# EAGLE board ADCModule (EAGLE 6.4)
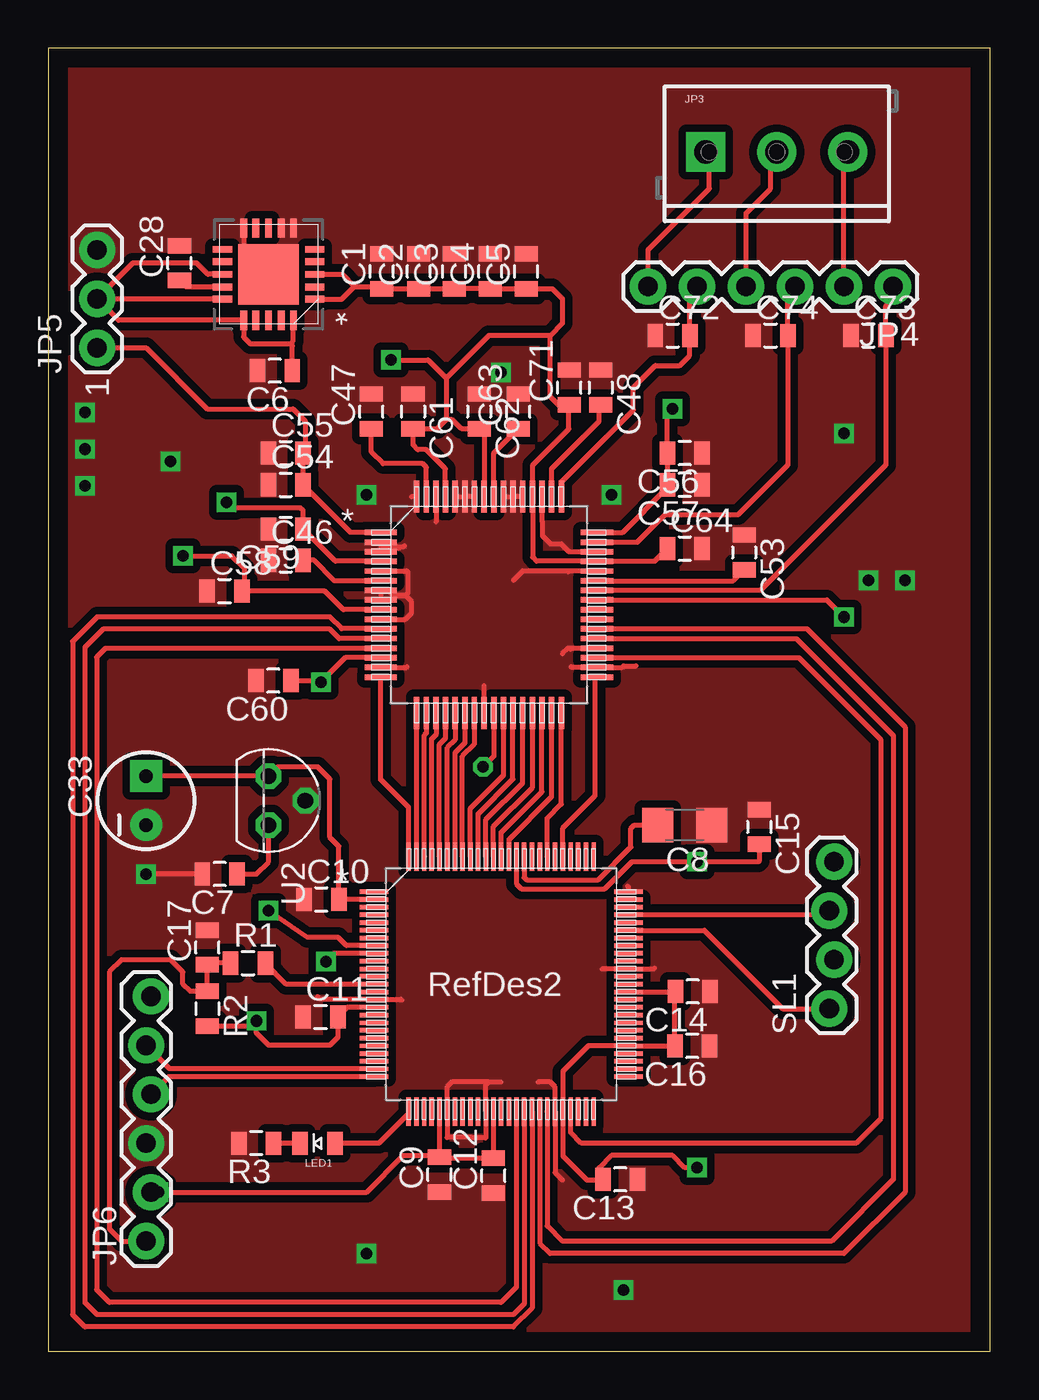
[diagram p0: board, top side]
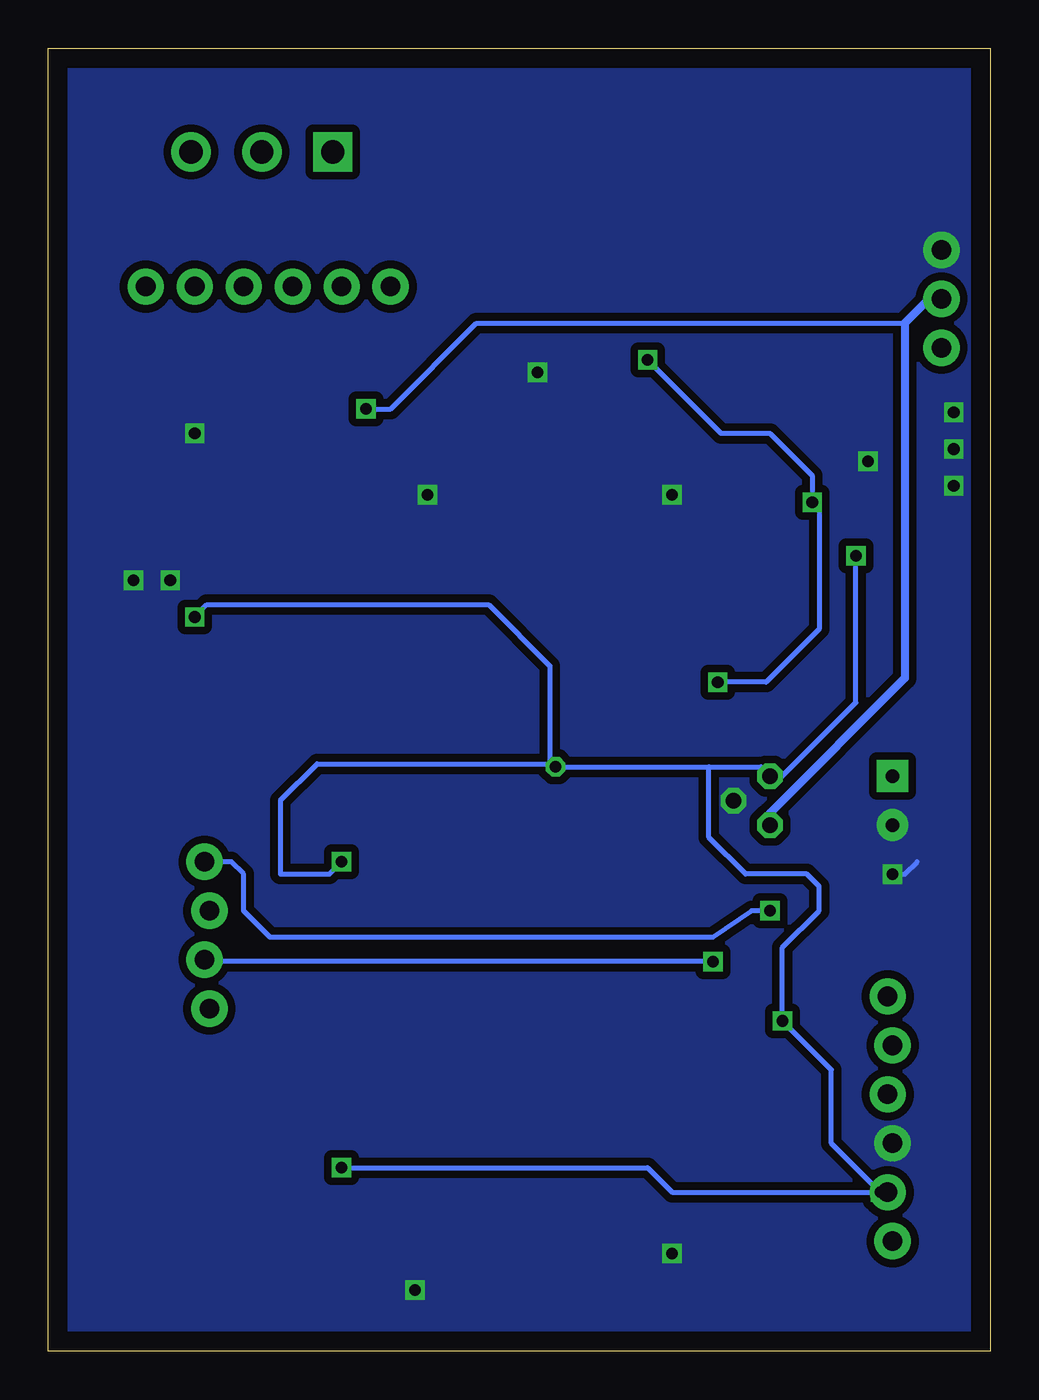
[diagram p1: board, bottom side, seen from below]

Size 48.88 x 67.61 mm. Coordinates in mm from the lower left corner, seen from the top.
Outline: 0,0 48.88,0 48.88,67.61 0,67.61 0,0
Copper layers (1*16): Top 0.035mm / dielectric 1.5mm / Bottom 0.035mm
Design rules "default": minimum track width 10mil, minimum drill 24mil, track to track 8mil, track to pad 8mil, pad to pad 8mil, via to via 8mil, smd to smd 8mil, copper to edge 40mil, drill to drill 8mil, minimum pad ring 10mil, minimum via ring 8mil, stop-mask expansion 4mil, vias tented up to drill 0mil, thermal gap 10mil

## Footprints (pad centres in the part's own frame; a part is rotated, then mirrored left to right if it is on the bottom)
0805 = smd 0.8 x 1.2: 1 -0.9,0; 2 0.9,0
1206 = smd 1.6 x 1.8: 1 -1.4,0; 2 1.4,0
CPOL-RADIAL-10UF-25V = drill 0.7 pad 1.651 square: 1 1.27,0 | drill 0.7 pad 1.651: 2 -1.27,0
SCREWTERMINAL-3.5MM-3_LOCK.007S = drill 1.2 pad 2.032 square: 1 -0.178,0 | drill 1.2 pad 2.032: 2 3.5,0; 3 7.178,0
1X06 = drill 1.016 pad 1.88: 1 -6.35,0; 2 -3.81,0; 3 -1.27,0; 4 1.27,0; 5 3.81,0; 6 6.35,0
1X03 = drill 1.016 pad 1.88: 1 -2.54,0; 2 0,0; 3 2.54,0
1X06-SIP_LOCK = drill 1.016 pad 1.88: 1 0,0; 2 2.54,-0.254; 3 5.08,0; 4 7.62,-0.254; 5 10.16,0; 6 12.7,-0.254
LED-0805 = smd 0.8 x 1.2: 1 -0.9,0; 2 0.9,0
1X04_LOCK = drill 1.016 pad 1.88: 1 0,0.127; 2 2.54,-0.127; 3 5.08,0.127; 4 7.62,-0.127
PM64 = smd 1.676 x 0.279: 1 -5.613,3.759; 2 -5.613,3.251; 3 -5.613,2.743; 4 -5.613,2.261; 5 -5.613,1.753; 6 -5.613,1.245; 7 -5.613,0.762; 8 -5.613,0.254; 9 -5.613,-0.254; 10 -5.613,-0.762; 11 -5.613,-1.245; 12 -5.613,-1.753; 13 -5.613,-2.261; 14 -5.613,-2.743; 15 -5.613,-3.251; 16 -5.613,-3.759; 33 5.613,-3.759; 34 5.613,-3.251; 35 5.613,-2.743; 36 5.613,-2.261; 37 5.613,-1.753; 38 5.613,-1.245; 39 5.613,-0.762; 40 5.613,-0.254; 41 5.613,0.254; 42 5.613,0.762; 43 5.613,1.245; 44 5.613,1.753; 45 5.613,2.261; 46 5.613,2.743; 47 5.613,3.251; 48 5.613,3.759 | smd 0.279 x 1.676: 17 -3.759,-5.613; 18 -3.251,-5.613; 19 -2.743,-5.613; 20 -2.261,-5.613; 21 -1.753,-5.613; 22 -1.245,-5.613; 23 -0.762,-5.613; 24 -0.254,-5.613; 25 0.254,-5.613; 26 0.762,-5.613; 27 1.245,-5.613; 28 1.753,-5.613; 29 2.261,-5.613; 30 2.743,-5.613; 31 3.251,-5.613; 32 3.759,-5.613; 49 3.759,5.613; 50 3.251,5.613; 51 2.743,5.613; 52 2.261,5.613; 53 1.753,5.613; 54 1.245,5.613; 55 0.762,5.613; 56 0.254,5.613; 57 -0.254,5.613; 58 -0.762,5.613; 59 -1.245,5.613; 60 -1.753,5.613; 61 -2.261,5.613; 62 -2.743,5.613; 63 -3.251,5.613; 64 -3.759,5.613
TO92 = drill 0.813 octagon: 1 -1.27,0; 2 0,1.905; 3 1.27,0
TQFP100_12X12MC = smd 1.473 x 0.229: 1 -6.604,4.801; 2 -6.604,4.394; 3 -6.604,3.988; 4 -6.604,3.607; 5 -6.604,3.2; 6 -6.604,2.794; 7 -6.604,2.388; 8 -6.604,2.007; 9 -6.604,1.6; 10 -6.604,1.194; 11 -6.604,0.787; 12 -6.604,0.406; 13 -6.604,0; 14 -6.604,-0.406; 15 -6.604,-0.787; 16 -6.604,-1.194; 17 -6.604,-1.6; 18 -6.604,-2.007; 19 -6.604,-2.388; 20 -6.604,-2.794; 21 -6.604,-3.2; 22 -6.604,-3.607; 23 -6.604,-3.988; 24 -6.604,-4.394; 25 -6.604,-4.801; 51 6.604,-4.801; 52 6.604,-4.394; 53 6.604,-3.988; 54 6.604,-3.607; 55 6.604,-3.2; 56 6.604,-2.794; 57 6.604,-2.388; 58 6.604,-2.007; 59 6.604,-1.6; 60 6.604,-1.194; 61 6.604,-0.787; 62 6.604,-0.406; 63 6.604,0; 64 6.604,0.406; 65 6.604,0.787; 66 6.604,1.194; 67 6.604,1.6; 68 6.604,2.007; 69 6.604,2.388; 70 6.604,2.794; 71 6.604,3.2; 72 6.604,3.607; 73 6.604,3.988; 74 6.604,4.394; 75 6.604,4.801 | smd 0.229 x 1.473: 26 -4.801,-6.604; 27 -4.394,-6.604; 28 -3.988,-6.604; 29 -3.607,-6.604; 30 -3.2,-6.604; 31 -2.794,-6.604; 32 -2.388,-6.604; 33 -2.007,-6.604; 34 -1.6,-6.604; 35 -1.194,-6.604; 36 -0.787,-6.604; 37 -0.406,-6.604; 38 0,-6.604; 39 0.406,-6.604; 40 0.787,-6.604; 41 1.194,-6.604; 42 1.6,-6.604; 43 2.007,-6.604; 44 2.388,-6.604; 45 2.794,-6.604; 46 3.2,-6.604; 47 3.607,-6.604; 48 3.988,-6.604; 49 4.394,-6.604; 50 4.801,-6.604; 76 4.801,6.604; 77 4.394,6.604; 78 3.988,6.604; 79 3.607,6.604; 80 3.2,6.604; 81 2.794,6.604; 82 2.388,6.604; 83 2.007,6.604; 84 1.6,6.604; 85 1.194,6.604; 86 0.787,6.604; 87 0.406,6.604; 88 0,6.604; 89 -0.406,6.604; 90 -0.787,6.604; 91 -1.194,6.604; 92 -1.6,6.604; 93 -2.007,6.604; 94 -2.388,6.604; 95 -2.794,6.604; 96 -3.2,6.604; 97 -3.607,6.604; 98 -3.988,6.604; 99 -4.394,6.604; 100 -4.801,6.604
RGW20_3P15X3P15 = smd 0.991 x 0.356: 1 -2.388,1.295; 2 -2.388,0.66; 3 -2.388,0; 4 -2.388,-0.66; 5 -2.388,-1.295; 11 2.388,-1.295; 12 2.388,-0.66; 13 2.388,0; 14 2.388,0.66; 15 2.388,1.295 | smd 0.356 x 0.991: 6 -1.295,-2.388; 7 -0.66,-2.388; 8 0,-2.388; 9 0.66,-2.388; 10 1.295,-2.388; 16 1.295,2.388; 17 0.66,2.388; 18 0,2.388; 19 -0.66,2.388; 20 -1.295,2.388 | smd 3.15 x 3.15: 21 0,0

## Placement (x,y rotation side)
C1  10uF  [0805]  17.3,56.03 90 top
C2  10uF  [0805]  19.23,56.03 90 top
C3  10uF  [0805]  21.06,56.03 90 top
C4  10uF  [0805]  22.94,56.03 90 top
C5  10uF  [0805]  24.79,56.03 90 top
C6  10uF  [0805]  11.76,50.88 180 top
C7  10uF  [0805]  8.89,24.77 180 top
C8  10uF  [1206]  33.02,27.3 180 top
C9  .1uF  [0805]  20.29,9.17 90 top
C10  .1uF  [0805]  14.17,23.44 0 top
C11  .1uF  [0805]  14.12,17.35 0 top
C12  .1uF  [0805]  23.09,9.12 90 top
C13  .1uF  [0805]  29.67,8.92 180 top
C14  .1uF  [0805]  33.43,18.67 180 top
C15  .1uF  [0805]  36.88,27.2 270 top
C16  .1uF  [0805]  33.4,15.85 180 top
C17  .1uF  [0805]  8.26,20.95 90 top
C28  1uF  [0805]  6.81,56.46 90 top
C33  10uF  [CPOL-RADIAL-10UF-25V]  5.08,28.57 90 top
C46  10uF  [0805]  12.32,41.05 0 top
C47  10uF  [0805]  16.76,48.77 90 top
C48  10uF  [0805]  28.65,50.01 270 top
C53  10uF  [0805]  36.09,41.45 270 top
C54  10uF  [0805]  12.32,44.96 0 top
C55  .1uF  [0805]  12.32,46.61 0 top
C56  10uF  [0805]  33.02,46.61 180 top
C57  .1uF  [0805]  33.02,44.96 180 top
C58  1uF  [0805]  9.14,39.45 0 top
C59  .1uF  [0805]  12.32,42.67 180 top
C60  .1uF  [0805]  11.68,34.8 180 top
C61  .1uF  [0805]  18.92,48.77 270 top
C62  .1uF  [0805]  22.35,48.77 270 top
C63  .47uF  [0805]  24.38,48.77 90 top
C64  .1uF  [0805]  33.02,41.66 0 top
C71  .1uF  [0805]  27.03,50.01 90 top
C72  10nF  [0805]  32.38,52.71 0 top
C73  10nF  [0805]  42.55,52.71 0 top
C74  10nF  [0805]  37.47,52.71 0 top
JP3  M03SCREW_LOCK  [SCREWTERMINAL-3.5MM-3_LOCK.007S]  34.29,62.23 0 top
JP4  [1X06]  37.47,55.25 180 top
JP5  M03PTH  [1X03]  2.54,54.61 90 top
JP6  [1X06-SIP_LOCK]  5.08,5.71 90 top
LED1  [LED-0805]  13.97,10.79 180 top
R1  470  [0805]  10.36,20.14 0 top
R2  10k  [0805]  8.26,17.78 270 top
R3  [0805]  10.79,10.79 180 top
SL1  [1X04_LOCK]  40.64,17.78 90 top
U1  ADS8568_PM_64  [PM64]  22.86,38.74 0 top
U2  LP2950-3.3ACZ  [TO92]  11.43,28.57 270 top
U$1  PIC32MX795F512L-  [TQFP100_12X12MC]  23.5,19.05 0 top
U$3  TPS7A4700_RGW_20  [RGW20_3P15X3P15]  11.43,55.88 180 top

## Library data of the parts
C1-C17 C28 C33 C46-C48 C53-C64 C71-C74 R1-R3 U1 U$1 U$3 = SensorCape
JP3-JP6 LED1 SL1 U2 = ASL

## Nets
AA1_R_OUT: C73.2 JP4.1 U1.42
AA2_R_OUT: C74.2 JP4.3 U1.47
AA3_R_OUT: C72.2 JP4.5 U1.49
BUSY: U1.35 U$1.47
CONV_A: U1.37 U$1.44
CONV_B: U1.38 U$1.43
CONV_C: U1.39
CONV_D: U1.40
CS*: U1.13 U$1.40
GND: C1.2 C2.2 C3.2 C4.2 C5.2 C6.2 C7.2 C8.1 C9.1 C10.1 C11.1 C12.1 C13.1 C14.1 C15.1 C16.1 C17.2 C28.2 C33.2 C46.1 C47.2 C48.1 C53.1 C54.1 C55.1 C56.1 C57.1 C58.1 C59.2 C60.2 C61.1 C62.1 C63.2 C64.2 C71.2 C72.1 C73.1 C74.1 JP5.3 JP6.3 R3.2 U1.2 U1.3 U1.5 U1.7 U1.8 U1.10 U1.15 U1.24 U1.34 U1.36 U1.44 U1.46 U1.51 U1.53 U1.54 U1.55 U1.58 U1.59 U1.60 U1.62 U1.64 U2.2 U$1.15 U$1.31 U$1.36 U$1.45 U$1.65 U$1.75 U$3.6 U$3.7 U$3.10 U$3.21
HVDD_12A: C6.1 C7.1 C56.2 C57.2 JP5.2 U1.48 U2.3 U$3.13 U$3.15 U$3.16 U$3.20
HVSS_12A: C54.2 C55.2 JP5.1 U1.1
MCLR: C17.1 JP6.1 R1.1 R2.1
MISO: SL1.2 U$1.9
MOSI: SL1.3 U$1.72
N$1: JP3.3 JP4.2
N$2: JP3.2 JP4.4
N$3: JP3.1 JP4.6
N$4: C8.2 U$1.85
N$7: C63.1 U1.56
N$14: R1.2 U$1.13
N$15: LED1.1 U$1.26
N$16: LED1.2 R3.1
N$45: C28.1 U$3.14
N$87: C46.2 U1.6
N$93: C53.2 U1.43
N$94: C48.2 U1.50
N$96: C47.1 U1.63
PGC: JP6.5 U$1.24
PGD: JP6.4 U$1.25
PMP0: U1.33 U$1.80
PMP1: U1.32 U$1.82
PMP2: U1.31 U$1.87
PMP3: U1.30 U$1.88
PMP4: U1.29 U$1.89
PMP5: U1.28 U$1.90
PMP6: U1.27 U$1.91
PMP7: U1.26 U$1.92
PMP8: U1.23 U$1.93
PMP9: U1.22 U$1.94
PMP10: U1.21 U$1.95
PMP11: U1.20 U$1.96
PMP12: U1.19 U$1.97
PMP13: U1.18 U$1.98
PMP14: U1.17 U$1.99
PMP15: U1.16 U$1.100
RD*: U1.12 U$1.41
SCK: SL1.1 U$1.70
SS: SL1.4 U$1.8
VDD3V3_D: C9.2 C10.2 C11.2 C12.2 C13.2 C14.2 C15.2 C16.2 C33.1 C58.2 JP6.2 R2.2 U1.9 U1.25 U1.41 U2.1 U$1.2 U$1.16 U$1.30 U$1.37 U$1.46 U$1.55 U$1.62 U$1.86
VDD5V0_A: C1.1 C2.1 C3.1 C4.1 C5.1 C59.1 C60.1 C61.2 C62.2 C64.1 C71.1 U1.4 U1.14 U1.45 U1.52 U1.57 U1.61 U$3.1 U$3.3
WR*: U1.11 U$1.42

## Tracks (layer width: path | path; a pad name or v marks a point on that pad's centre or on a via)
AA1_R_OUT
  Top 0.254: JP4.1 43.81,54.61 43.45,54.24 C73.2 43.45,45.99 36.96,39.5 U1.42
AA2_R_OUT
  Top 0.254: U1.47 30.56,41.99 31.75,43.18 31.77,43.18 32,43.41 35.79,43.41 38.37,45.99 C74.2 38.37,54.88 JP4.3
AA3_R_OUT
  Top 0.254: JP4.5 33.28,54.88 C72.2 33.27,52.69 33.27,51.66 32.77,51.16 31.5,51.16 30.35,50.01 30.35,48.84 26.62,45.11 U1.49
BUSY
  Top 0.254: U1.35 38.94,35.99 43.18,31.75 43.18,12.06 41.91,10.79 27.66,10.79 27.1,11.35 U$1.47
CONV_A
  Top 0.254: U1.37 38.81,36.98 43.84,31.95 43.84,8.91 40.64,5.71 26.67,5.71 25.88,6.5 U$1.44
CONV_B
  Top 0.254: U1.38 39.34,37.49 44.45,32.38 44.45,8.26 41.27,5.08 26.04,5.08 25.5,5.61 U$1.43
CS*
  Top 0.254: U1.13 2.97,36.47 2.52,36.02 2.52,3.2 3.17,2.54 23.5,2.54 24.28,3.33 U$1.40
GND  (via drill 0.6)
  Top 0.254: U1.62 20.12,43.03 | U1.64 18.85,44.35 | 18.49,41.78 18.47,41.76 17.35,41.76 17.25,41.86 U1.2 U1.3 17.25,41.5 17.42,41.68 18.21,41.68 18.24,41.71 | U1.5 18.59,40.49 18.67,40.41 18.67,39.37 18.54,39.24 17.86,39.24 17.6,39.5 U1.7 U1.8 17.73,38.99 17.96,39.22 18.54,39.22 18.82,38.94 18.82,38.28 18.52,37.97 U1.10 | U1.15 18.59,35.48 18.62,35.51 | 26.95,40.44 27,40.49 U1.44 24.61,40.49 24.13,40.01 | U1.46 27.03,41.48 26.59,41.91 26.04,41.91 25.63,42.32 25.63,43.03 25.6,43.05 U1.51 | 27.13,35.51 27.15,35.48 U1.34 29.77,35.48 29.84,35.56 30.48,35.56 | U1.36 27.15,36.47 | 27.15,36.47 27.1,36.42 | U1.24 22.61,34.54 | 27.15,36.47 26.95,36.47 26.67,36.2 | U1.55 U1.54 U1.53 | U$3.10 10.13,57.18 U$3.21 | U1.58 U1.59 U1.60 | U$1.75 30.1,24.11 30.07,24.11 30.05,24.13 | 31.45,19.89 31.39,19.84 U$1.65 28.73,19.84 | 22.68,11.07 22.71,11.1 U$1.36 22.71,13.82 22.86,13.97 | 20.7,11.12 U$1.31 20.7,13.74 20.93,13.97 22.86,13.97 | 20.7,11.12 20.68,11.1 | 18.34,18.21 18.29,18.26 U$1.15 14.12,18.26 13.97,18.41 | 26.67,8.89 26.29,9.27 U$1.45 26.29,13.72 26.04,13.97 25.4,13.97 | 20.7,11.12 21.92,11.12 21.95,11.1 22.63,11.1 22.68,11.15 | C7.2 v5.08,24.77 | 22.86,13.97 23.5,13.97
  Bottom 0.254: v5.08,24.77 4.45,24.77 3.81,25.4
  other vias: 42.55,40.01 44.45,40.01 6.35,46.18 1.91,44.91 1.91,46.81 1.91,48.72 41.27,47.62 23.5,50.8 16.51,44.45 29.21,44.45 16.51,5.08 29.84,3.17
  pour Top (isolate 0.406, no thermals): 0,67.31 48.9,67.31 48.9,-0.13 0,-0.13
  pour Bottom (isolate 0.406, no thermals): 0,0 48.9,0 48.9,67.31 0,67.31
HVDD_12A  (via drill 0.6)
  Top 0.254: U$3.15 2.54,54.59 JP5.2 | U$3.13 8.28,55.88 7.7,56.46 4.39,56.46 JP5.2 | JP5.2 3.66,53.49 U$3.16 10.13,52.63 10.49,52.27 12.55,52.27 | 12.55,52.27 12.7,52.43 12.7,53.47 U$3.20 | C6.1 12.66,52.16 12.55,52.27 | U1.48 29.79,42.49 32.12,44.82 C57.2 C56.2 32.12,48.63 v32.38,48.9 | C7.1 10.79,24.77 11.43,25.4 U2.3
  Bottom 0.254: v32.38,48.9 31.11,48.9 26.67,53.34 4.45,53.34
  Bottom 0.406: U2.3 11.43,27.94 4.45,34.93 4.45,53.34 3.17,54.61 JP5.2
HVSS_12A
  Top 0.254: JP5.1 5.08,52.07 8.26,48.9 12.7,48.9 13.34,48.26 13.34,46.73 C55.2 C54.2 15.68,42.49 U1.1
MCLR
  Top 0.254: R1.1 8.34,20.14 C17.1 R2.1 7.36,18.68 6.99,19.05 6.99,19.68 6.35,20.32 3.81,20.32 3.17,19.68 3.17,6.35 3.81,5.71 JP6.1
MISO  (via drill 0.6)
  Top 0.254: U$1.9 14.83,20.65 v14.4,20.22
  Bottom 0.254: v14.4,20.22 40.66,20.22 SL1.2
MOSI
  Top 0.254: U$1.72 40.31,22.66 SL1.3
N$1
  Top 0.254: JP4.2 41.27,62.04 JP3.3
N$2
  Top 0.254: JP4.4 36.2,59.05 37.47,60.33 37.47,61.91 JP3.2
N$3
  Top 0.254: JP4.6 31.11,57.15 34.29,60.33 34.29,62.05 JP3.1
N$4
  Top 0.254: U$1.85 24.69,24.59 24.82,24.46 28.52,24.46 30.23,26.16 30.23,27.13 30.4,27.3 C8.2
N$7
  Top 0.254: U1.56 23.11,46.61 23.5,46.99 23.51,46.99 C63.1
N$14
  Top 0.254: U$1.13 12.36,19.05 R1.2
N$15
  Top 0.254: U$1.26 18.69,12.34 17.14,10.79 LED1.1
N$16
  Top 0.254: LED1.2 R3.1
N$45
  Top 0.254: U$3.14 7.15,55.22 C28.1
N$87
  Top 0.254: U1.6 14.86,39.98 13.79,41.05 C46.2
N$93
  Top 0.254: U1.43 35.52,39.98 C53.2
N$94
  Top 0.254: U1.50 26.11,45.8 28.57,48.26 28.57,49.04 C48.2
N$96
  Top 0.254: U1.63 19.61,45.87 19.43,46.05 17.37,46.05 16.76,46.66 C47.1
PGC
  Top 0.254: U$1.24 6.3,14.66 JP6.5
PGD
  Top 0.254: U$1.25 6.25,14.25 JP6.4
PMP0
  Top 0.254: U$1.80 26.7,27.15 28.37,28.83 28.37,34.87 U1.33
PMP1
  Top 0.254: U$1.82 25.88,27.66 26.62,28.4 U1.32
PMP2
  Top 0.254: U$1.87 23.9,26.57 26.11,28.78 U1.31
PMP3
  Top 0.254: U$1.88 23.5,26.92 25.6,29.03 U1.30
PMP4
  Top 0.254: U$1.89 23.09,27.23 25.12,29.26 U1.29 25.09,33.1
PMP5
  Top 0.254: U$1.90 22.71,27.58 24.61,29.49 U1.28
PMP6
  Top 0.254: U$1.91 22.3,27.89 24.11,29.69 U1.27
PMP7
  Top 0.254: U$1.92 21.89,28.17 23.62,29.9 U1.26
PMP8
  Top 0.254: U$1.93 21.49,30.89 22.1,31.5 U1.23
PMP9
  Top 0.254: U$1.94 21.11,31.06 21.61,31.57 U1.22
PMP10
  Top 0.254: U$1.95 20.7,31.32 21.11,31.72 U1.21
PMP11
  Top 0.254: U$1.96 20.3,31.5 20.6,31.8 U1.20
PMP12
  Top 0.254: U$1.97 19.89,31.77 20.12,32 U1.19
PMP13
  Top 0.254: U$1.98 19.51,31.98 19.61,32.08 U1.18
PMP14
  Top 0.254: U1.17 U$1.99
PMP15
  Top 0.254: U$1.100 18.69,28.22 17.25,29.67 U1.16
RD*
  Top 0.254: U1.12 15.09,36.98 14.61,37.47 2.85,37.47 1.91,36.53 1.91,2.54 2.54,1.91 24.13,1.91 24.69,2.46 U$1.41
SCK
  Top 0.254: U$1.70 34.04,21.84 38.1,17.78 SL1.1
SS  (via drill 0.6)
  Top 0.254: U$1.8 15.47,21.06 15.04,21.49 13.44,21.49 v11.43,22.86
  Bottom 0.254: v11.43,22.86 12.39,22.86 14.4,21.49 37.36,21.49 38.73,22.86 38.73,24.77 39.37,25.4 SL1.4
VDD3V3_D  (via drill 0.6)
  Top 0.254: U1.9 15.32,38.48 14.35,39.45 C58.2 10.16,39.56 10.16,40.64 9.53,41.28 v6.99,41.28 | C33.1 U2.1 11.91,30.33 13.97,30.33 14.61,29.69 14.61,26.67 15.07,26.2 C10.2 U$1.2 | U1.25 23.11,30.89 v22.55,30.33 | v41.27,38.1 40.39,38.99 U1.41 | R2.2 10.53,16.88 v10.79,17.14 10.79,16.51 11.43,15.88 14.61,15.88 15.02,16.29 C11.2 15.53,17.86 U$1.16 | U$1.30 C9.2 | U$1.37 C12.2 20.34,10.02 C9.2 | U$1.62 32.5,18.64 | U$1.86 24.28,24.26 24.54,24 28.88,24 30.28,25.4 v33.66,25.4 36.83,25.4 36.88,25.45 C15.2 | v5.71,8.26 16.51,8.26 18.41,10.16 20.2,10.16 C9.2 | v33.66,9.53 33.02,9.53 32.38,10.16 29.21,10.16 28.57,9.53 28.57,9.11 C13.2 28.74,8.89 27.94,8.89 26.7,10.13 U$1.46 26.7,14.53 28.02,15.85 U$1.55 C16.2 32.5,18.64 | 32.5,18.64 C14.2
  Bottom 0.254: v6.99,41.28 6.99,33.66 10.79,29.84 U2.1 11.91,30.33 14.61,30.33 | v22.55,30.33 14.61,30.33 | v41.27,38.1 40.64,38.74 26.04,38.74 22.86,35.56 22.86,30.63 v22.55,30.33 | 14.61,30.33 14.61,26.67 12.7,24.77 9.53,24.77 8.89,24.13 8.89,22.86 10.79,20.95 v10.79,17.14 8.26,14.61 8.26,10.79 v5.71,8.26 | JP6.2 v5.71,8.26 | v33.66,9.53 17.78,9.53 16.51,8.26 v5.71,8.26 | v22.55,30.33 22.71,30.48 34.92,30.48 36.83,28.57 36.83,24.77 34.29,24.77 v33.66,25.4
VDD5V0_A  (via drill 0.6)
  Top 0.254: U1.4 14.89,41 C59.1 13.22,43.63 13.08,43.76 9.53,43.76 v9.25,44.04 | U1.61 20.6,45.8 19.61,46.79 19.18,46.79 18.92,47.04 C61.2 20.18,47.87 20.65,48.34 | U1.57 22.61,47.61 C62.2 21.41,47.88 20.95,48.34 20.65,48.34 | U$3.3 15.24,55.88 15.88,55.25 | U$3.1 15.21,54.59 15.88,55.25 | 15.88,55.25 16.88,55.25 C1.1 C2.1 C3.1 C4.1 C5.1 26.15,55.13 26.67,54.61 26.67,53.34 26.04,52.71 | 26.04,52.71 22.86,52.71 20.65,50.5 | 20.65,50.5 20.65,48.34 | v17.78,51.44 19.71,51.44 20.65,50.5 | C64.1 31.46,41 U1.45 25.32,41 25.12,41.2 U1.52 25.12,45.97 27,47.85 27,49.09 C71.1 26.45,49.11 26.04,49.53 26.04,52.71 | U1.14 15.42,35.99 v14.15,34.72 14.07,34.8 C60.1
  Bottom 0.254: v17.78,51.44 13.97,47.62 11.43,47.62 9.25,45.44 v9.25,44.04 8.89,43.69 8.89,37.47 11.63,34.72 v14.15,34.72
WR*
  Top 0.254: U1.11 15.21,37.49 14.61,38.1 2.54,38.1 1.27,36.83 1.27,1.91 1.91,1.27 24.13,1.27 25.09,2.23 U$1.42